# EAGLE board mini layout_21 (EAGLE 5.11)
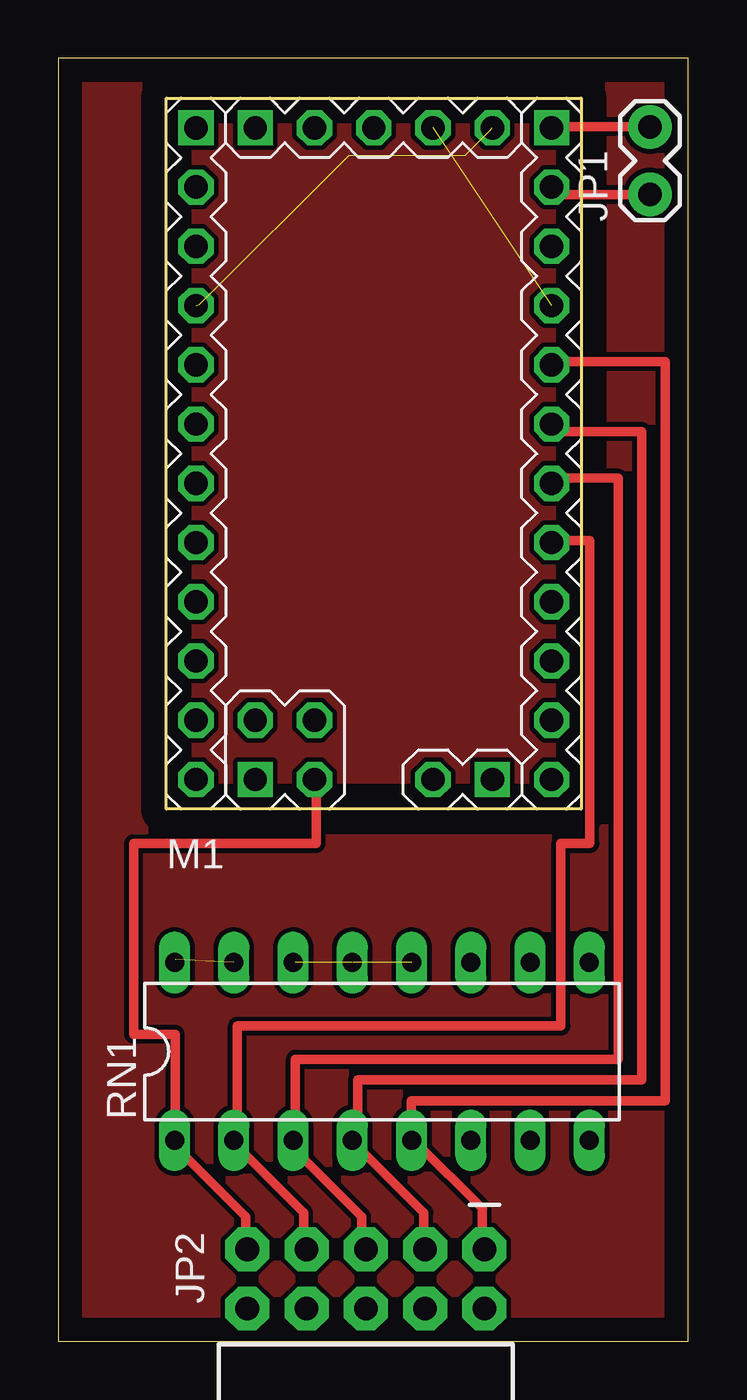
[diagram p0: board, top side]
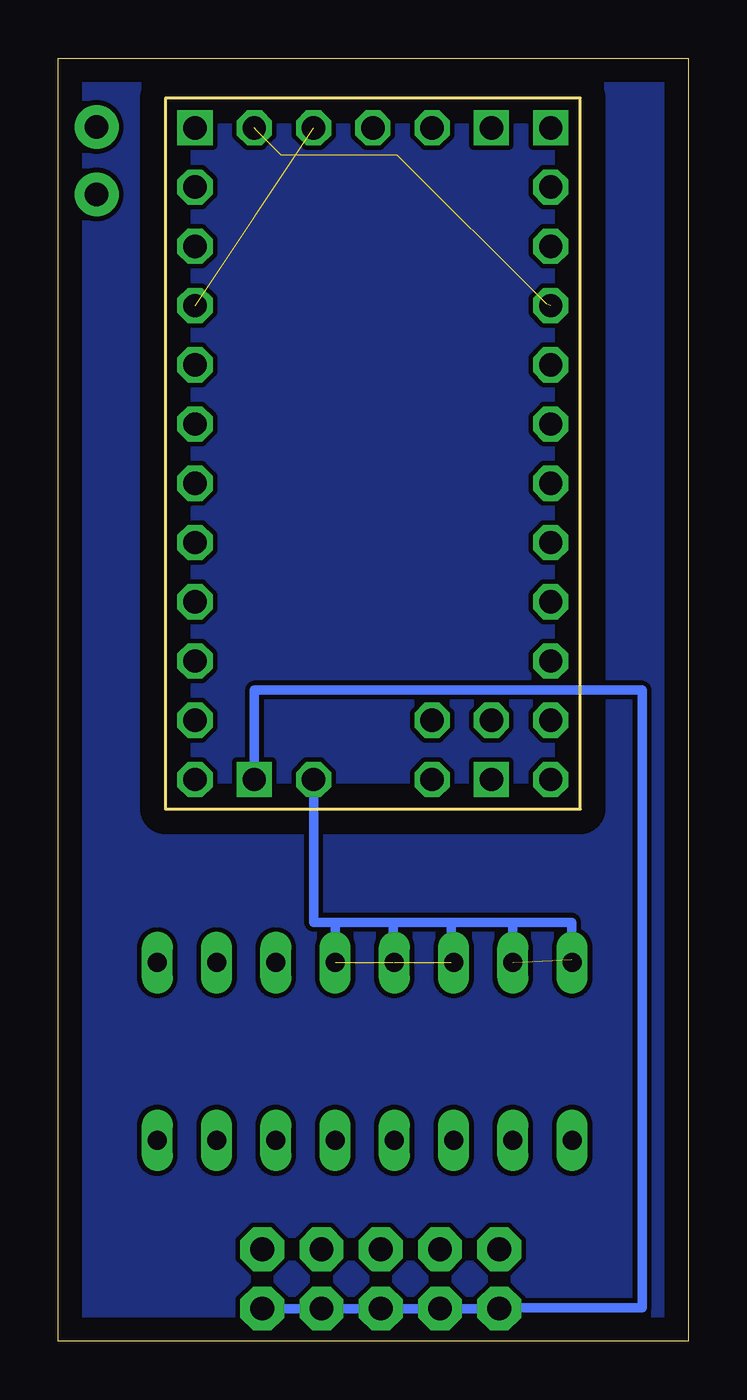
[diagram p1: board, bottom side, seen from below]

Size 27 x 55 mm. Coordinates in mm from the lower left corner, seen from the top.
Outline: 0,0 27,0 27,55 0,55 0,0
Copper layers (1*16): Top 0.035mm / dielectric 1.5mm / Bottom 0.035mm
Design rules "default": minimum track width 10mil, minimum drill 24mil, track to track 8mil, track to pad 8mil, pad to pad 8mil, via to via 8mil, smd to smd 8mil, copper to edge 40mil, drill to drill 8mil, minimum pad ring 10mil, minimum via ring 8mil, stop-mask expansion 4mil, vias tented up to drill 0mil, thermal gap 10mil

## Footprints (pad centres in the part's own frame; a part is rotated, then mirrored left to right if it is on the bottom)
1X02_LOCK = drill 1.016 pad 1.88 round: 1 -0.178,0; 2 2.718,0
2X5-RA = drill 1.016 pad 1.88 octagon: 1 -1.27,5.08; 2 1.27,5.08; 3 -1.27,2.54; 4 1.27,2.54; 5 -1.27,0; 6 1.27,0; 7 -1.27,-2.54; 8 1.27,-2.54; 9 -1.27,-5.08; 10 1.27,-5.08
MINI04_ALL_PINS = drill 1 octagon: +5V@1 10.16,0; +5V@2 5.08,-20.32; +5V@3 5.08,7.62; AD0 10.16,-10.16; AD1 10.16,-7.62; AD2 10.16,-5.08; AD3 10.16,-2.54; AD5 0,-20.32; AD6 -2.54,-17.78; AD7 0,-17.78; D2 -5.08,-2.54; D3 -5.08,-5.08; D4 -5.08,-7.62; D5 -5.08,-10.16; D6 -5.08,-12.7; D7 -5.08,-15.24; D8 -5.08,-17.78; D9 -5.08,-20.32; D10 10.16,-20.32; D11 10.16,-17.78; D12 10.16,-15.24; D13 10.16,-12.7; GND@1 -5.08,0; GND@2 10.16,5.08; GND@4 7.62,7.62; RESET@1 -5.08,2.54; RESET@2 10.16,2.54; RX@1 -5.08,5.08; RX@2 2.54,7.62; TX@2 0,7.62 | drill 1 square: +9V 10.16,7.62; AD4 -2.54,-20.32; GND@3 7.62,-20.32; IO7 -2.54,7.62; TX@1 -5.08,7.62
DIL16 = drill 0.813 long: 1 -8.89,-3.81; 2 -6.35,-3.81; 3 -3.81,-3.81; 4 -1.27,-3.81; 5 1.27,-3.81; 6 3.81,-3.81; 7 6.35,-3.81; 8 8.89,-3.81; 9 8.89,3.81; 10 6.35,3.81; 11 3.81,3.81; 12 1.27,3.81; 13 -1.27,3.81; 14 -3.81,3.81; 15 -6.35,3.81; 16 -8.89,3.81

## Placement (x,y rotation side)
JP1  [1X02_LOCK]  25.36,49.34 90 top
JP2  M05X2RA  [2X5-RA]  13.18,2.67 270 top
M1  MINI04_ALL_PINS  [MINI04_ALL_PINS]  10.98,44.4 0 top
RN1  [DIL16]  13.87,12.42 0 top

## Library data of the parts
JP1 JP2 = SparkFun
M1 = arduino
RN1 = resistor-dil; OC_FARNELL: unknown; OC_NEWARK: unknown

## Nets
+5V: M1.+5V@1 M1.+5V@3
GND: M1.GND@1 M1.GND@4
N$1: JP1.1 M1.GND@2
N$2: JP2.2 JP2.10 M1.GND@3
N$3: JP2.9 RN1.1
N$4: JP2.7 RN1.2
N$6: JP2.3 M1.AD2 RN1.4
N$7: JP2.1 M1.AD3 RN1.5
N$8: JP2.5 M1.AD1 RN1.3
N$9: JP1.2 M1.+9V
N$10: M1.+5V@2 RN1.12 RN1.13 RN1.14 RN1.15 RN1.16

## Tracks (layer width: path | path; a pad name or v marks a point on that pad's centre or on a via)
+5V  (1 unrouted)
GND  (5 unrouted)
N$1
  Top 0.406: JP1.1 21.14,49.16 M1.GND@2
N$2
  Bottom 0.254: 8.02,1.42 JP2.10 | JP2.2 18.34,1.42
  Bottom 0.406: JP2.10 JP2.2 | M1.GND@3 18.6,27.91 1.98,27.91 1.98,1.42 8.02,1.42
N$3
  Top 0.254: JP2.9 8.02,4.09 | 5,8.53 RN1.1
  Top 0.406: JP2.9 8.02,4.02 8.02,5.33 5,8.36 5,8.53 5,13.16 3.22,13.16 3.22,21.34 11.05,21.34 11.05,24.18
N$4
  Top 0.254: 7.67,8.53 RN1.2 | JP2.7 10.51,4.09
  Top 0.406: RN1.2 7.49,8.61 | 7.67,8.53 7.85,8.53 7.85,8.18 10.51,5.51 10.51,4.07 JP2.7
N$5
  pour Top: 0,55 27,55 27,0 0,0
N$6
  Top 0.254: 12.65,8.53 RN1.4 | JP2.3 15.67,4.09
  Top 0.406: RN1.4 12.82,8.61 | M1.AD2 21.14,39 25,39 25,11.2 12.82,11.2 12.82,8.61 | 12.65,8.53 15.67,5.51 15.67,3.99 JP2.3 | 12.82,8.61 13,8.61
N$7
  Top 0.254: 15.31,8.53 RN1.5 | JP2.1 18.16,4.09
  Top 0.406: RN1.5 | M1.AD3 21.14,42 26,42 26,10.31 15.14,10.31 RN1.5 | 15.31,8.53 18.16,5.69 18.16,4.04 JP2.1 | RN1.5 15,8.61
N$8
  Top 0.254: JP2.5 13.18,4.09
  Top 0.406: 21.14,36.8 M1.AD1 21.14,37 24,37 24,12.09 10.16,12.09 10.16,8.61 RN1.3 | RN1.3 10,8.61 | RN1.3 10.06,8.28 13,5.33 13,4.12 JP2.5
N$9
  Top 0.406: JP1.2 21.14,52.06 M1.+9V
N$10  (3 unrouted)
  Bottom 0.254: RN1.16 5,16.36 | 15.14,16.36 RN1.12
  Bottom 0.406: 15.14,17.96 15.49,17.96 16.06,17.96 M1.+5V@2 | RN1.15 7.52,17.96 | RN1.14 10.16,16.23 10.16,17.96 | RN1.13 12.65,16.23 12.65,17.96 | 15.14,17.96 15.14,16.36 | 5,16.36 5,17.96 15.14,17.96
N$11
  pour Bottom: 0,55 27,55 27,0 0,0
S$1
  Top 0.406: 7.49,8.71 7.67,8.71 7.67,13.51 21.54,13.51 21.54,21.34 22.78,21.34 22.78,34.31 21.18,34.31